# Altium PCB Atmega328p_Breakout.PcbDoc
Units mm, origin at the board's own origin, x right, y up, seen from the top; angles counter-clockwise.
Board outline 72.5 x 60 mm, 2 copper layers (Top Layer, Bottom Layer); 4 components, 28 nets, 71 pads, 5 vias.
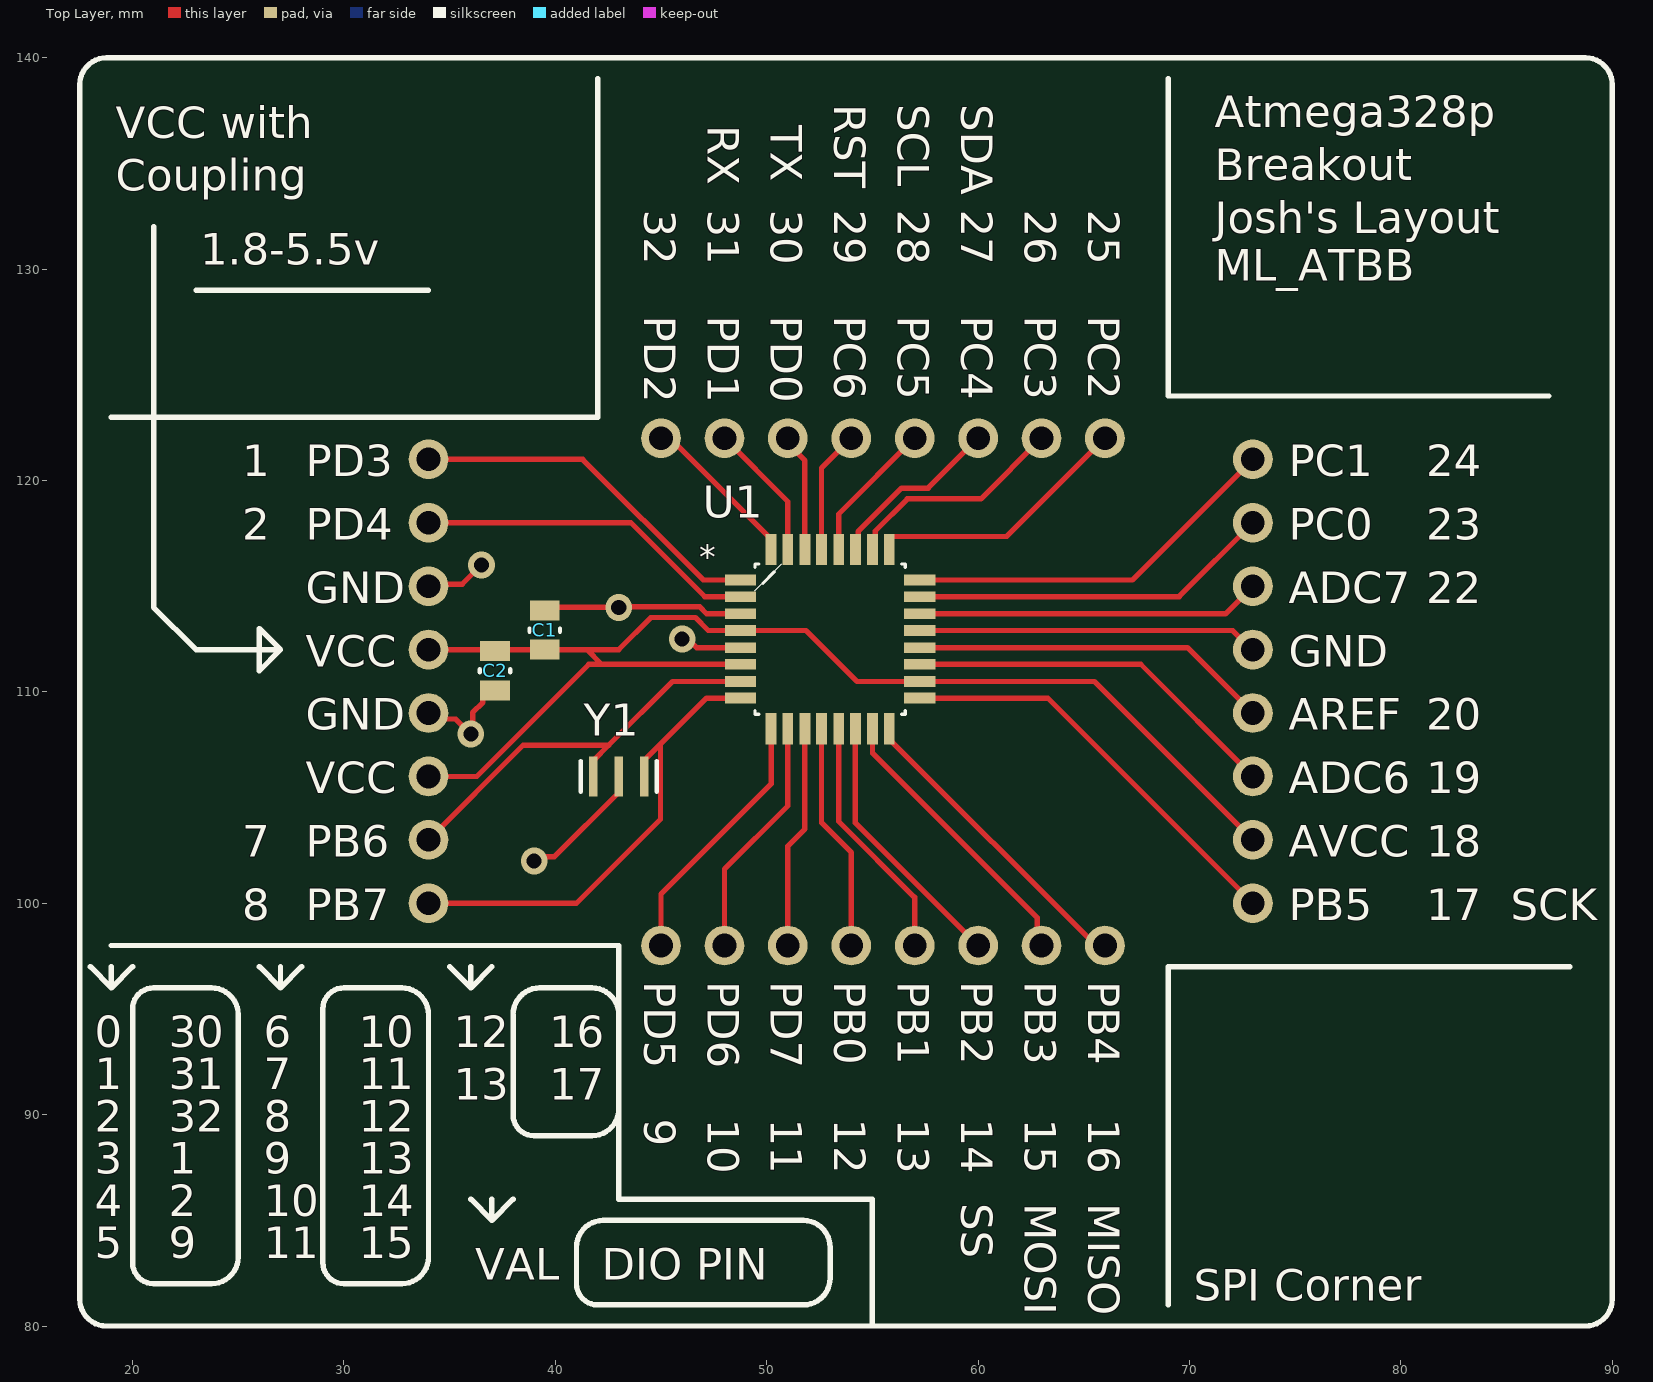
[diagram p0: Top Layer view]
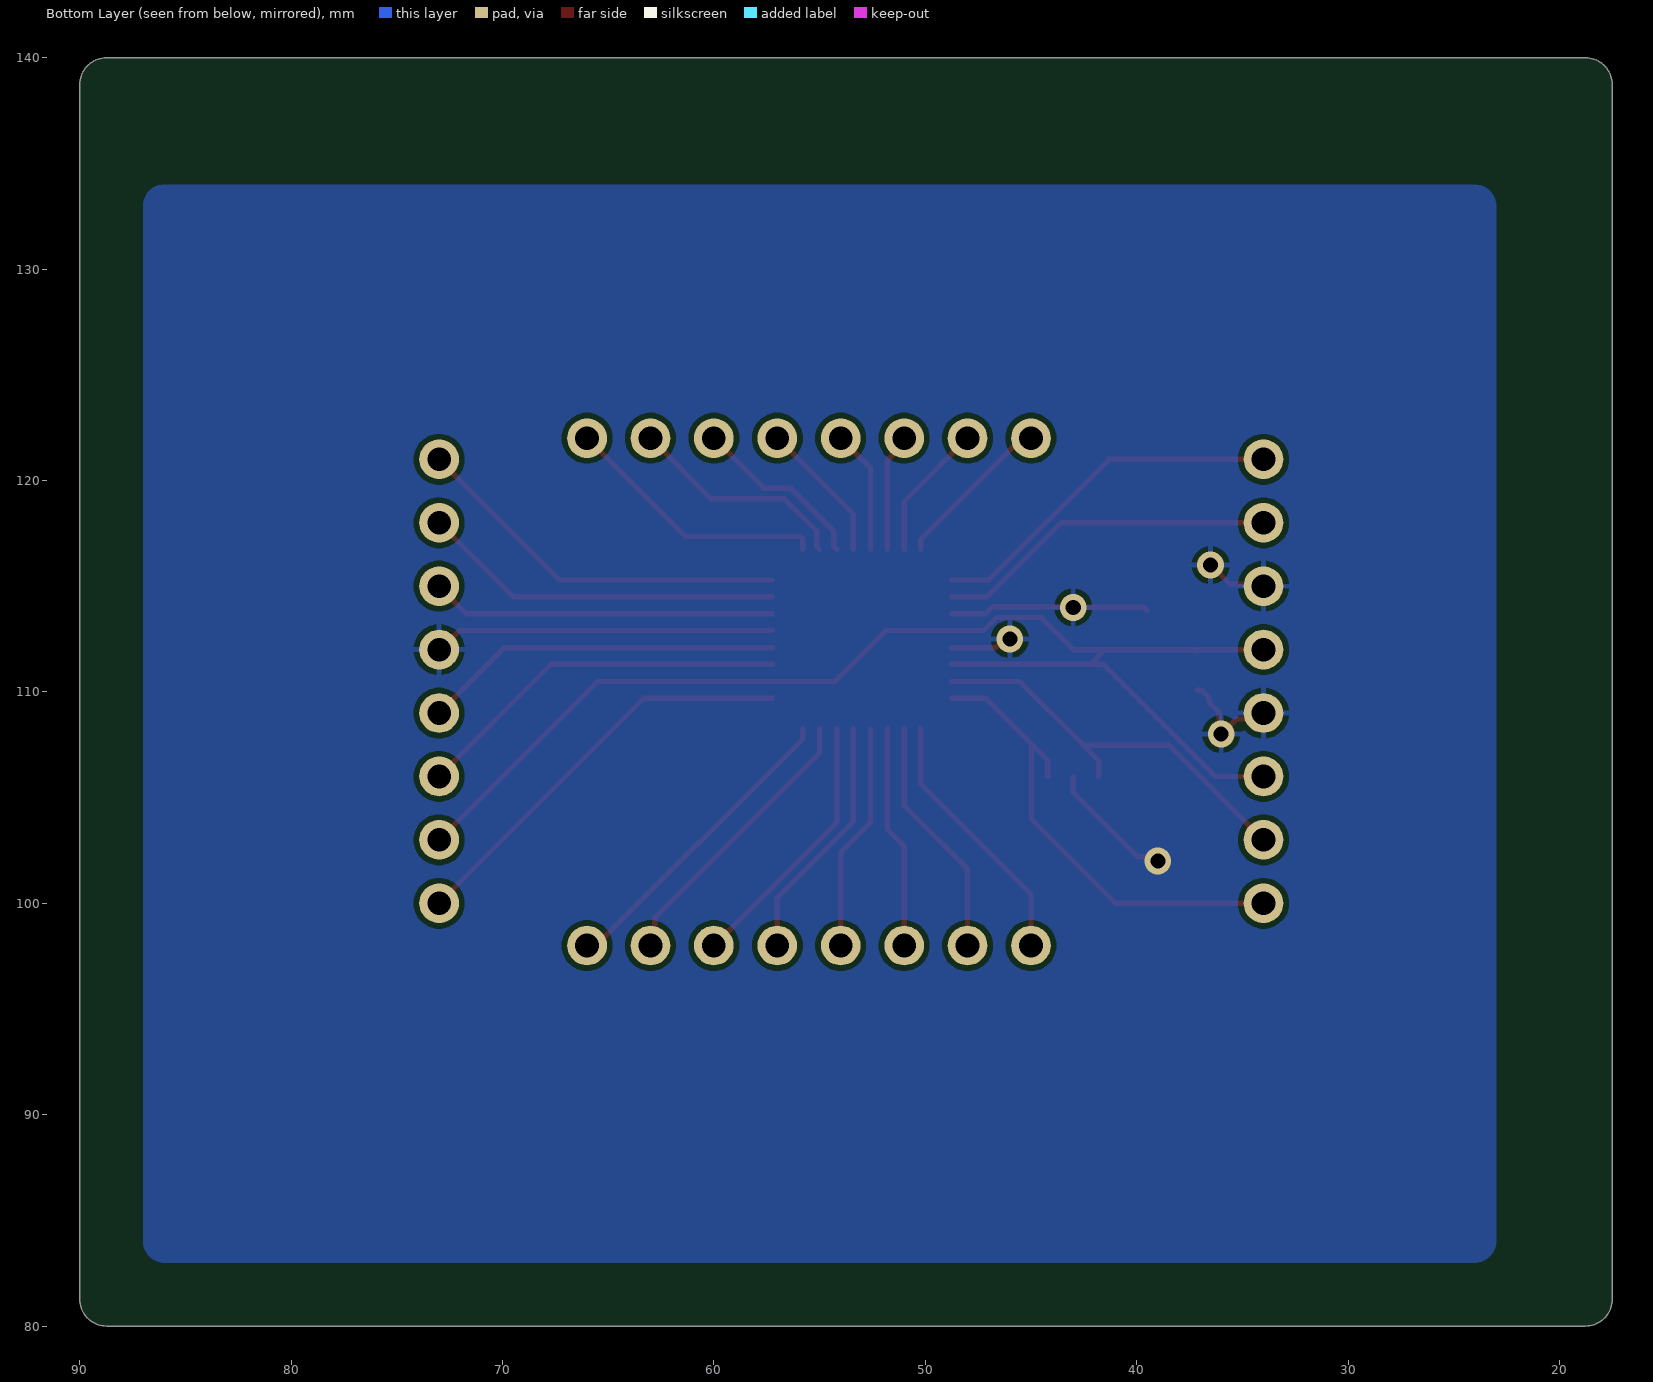
[diagram p1: Bottom Layer view, seen from below]
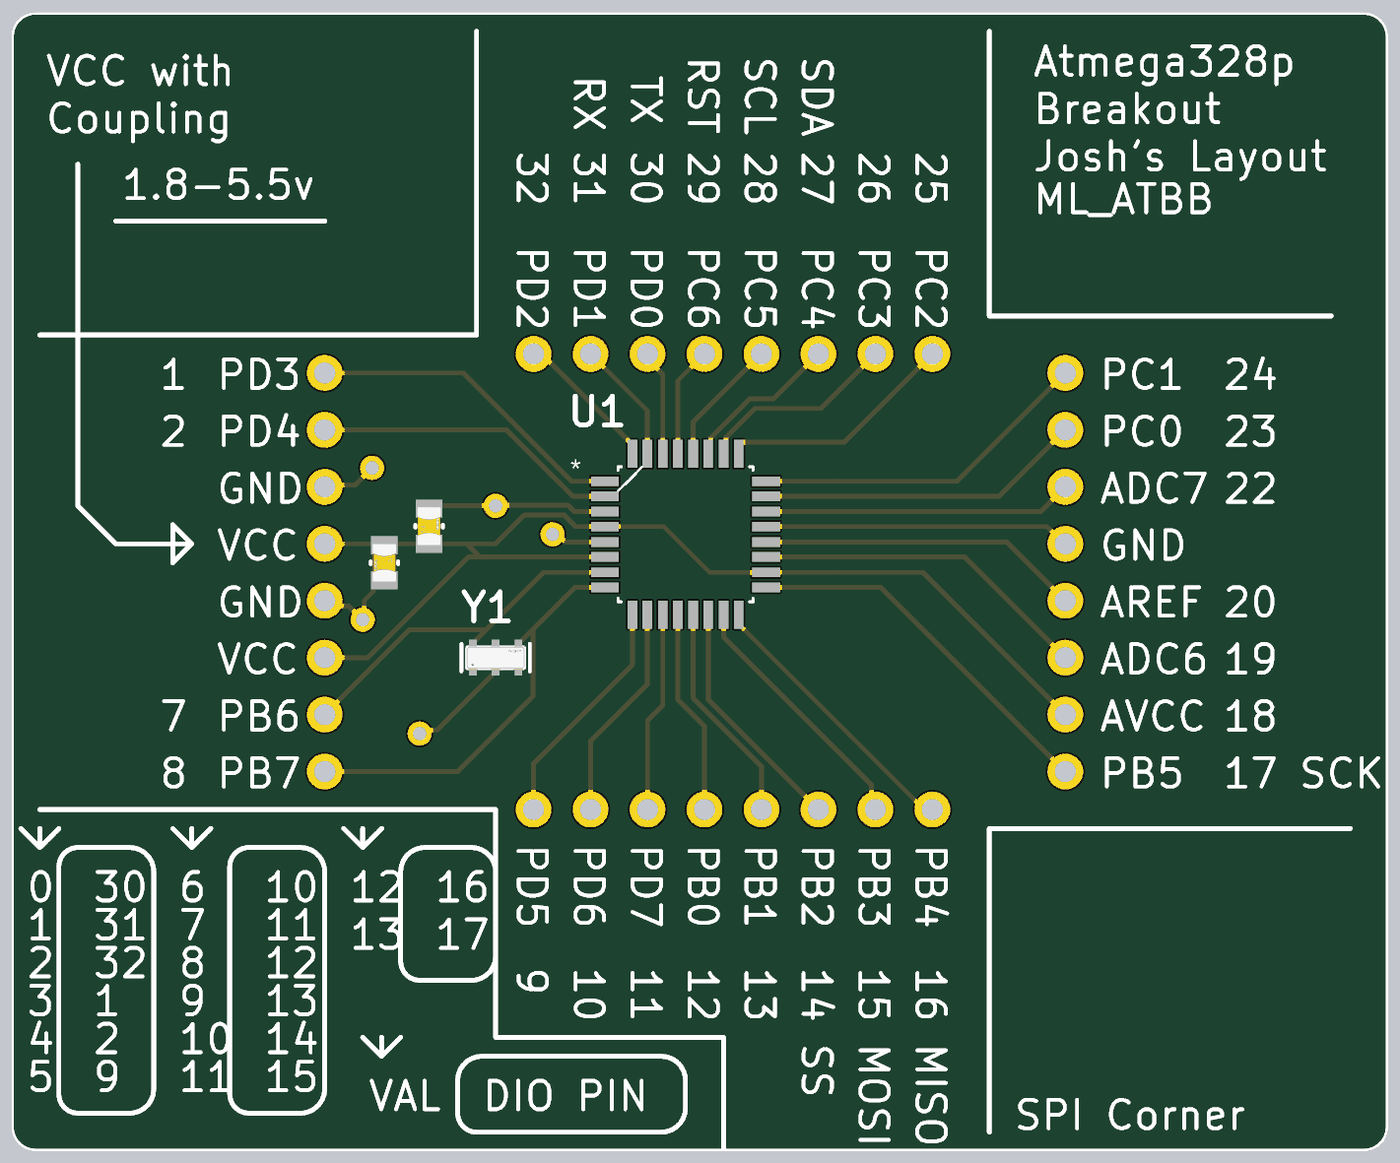
[diagram p2: 3D render of the assembled board from above, using the file's embedded part models]

## Layer stack, top to bottom
Top Solder: solder mask 0.0102, Solder Resist, Dk 3.5
Top Layer: signal copper 0.0356
Dielectric 1: dielectric 0.32, FR-4, Dk 4.8
Bottom Layer: signal copper 0.0356
Bottom Solder: solder mask 0.0102, Solder Resist, Dk 3.5

## Board outline
17.5,81.27 17.5,138.73 cw(c18.77,138.73) 18.77,140 88.73,140 cw(c88.73,138.73) 90,138.73 90,81.27 cw(c88.73,81.27) 88.73,80 18.77,80 cw(c18.77,81.27)

## Design rules (kind name [scope] priority, off if disabled: settings)
Clearance [All] p1: gap=0.254 ignorepadtopadclearanceinfootprint=FALSE
PolygonConnect [All] p1: connectstyle=Relief reliefconductorwidth=0.254 reliefentries=4 polygonreliefangle="90 Angle" airgapwidth=0.254
RoutingVias [All] p1: holewidth=0.711 width=1.27 viastyle="Through Hole" minholewidth=0.711 minwidth=1.27 maxholewidth=0.711 maxwidth=1.27
SolderMaskExpansion [All] p1: expansion=0.102 istentingtop=FALSE
SupplyNets "Schematic Supply Nets_1" [InNet('VCC')] p1: voltage=0.000
SupplyNets "Schematic Supply Nets" [InNet('GND')] p2: voltage=0.000
Width [All] p1: maxlimit=0.254 minlimit=0.254 preferedwidth=0.254
30 further rules are at their usual default settings.

## Components (designator, comment, footprint, x,y, rotation, side; value= is the part's Value field where it differs from the comment)
C1 "10uF" FP-CC0805-0_85-MFG 39.5,112.925 r90 top value="100 nF"
C2 "100nF" FP-CC0805-0_85-MFG 37.146,111 r270 top value="100 nF"
U1 "ATMEL-ATMEGA328P-AU_ATMEGA328P-AU" ATMEL-ATMEGA328P-AU_QFP80P900X900X120-32N 53,112.5 r0 top
Y1 "CSTNE16M0V530000R0" FP-CSTNE16M0V530000R0-MFG 43,106 r180 top

## Footprints (in the part's own frame and the unit in brackets; to place one, negate y for a bottom-side part, rotate by r counter-clockwise, add the part's x,y. Pads: shape width x height; smd on the part's side, far side on the other; paste and mask are expansions set on the pad)
ATMEL-ATMEGA328P-AU_QFP80P900X900X120-32N [mil]
  rect 58x20 smd: 1(-167,110) 2(-167,79) 3(-167,47) 4(-167,16) 5(-167,-16) 6(-167,-47) 7(-167,-79) 8(-167,-110) 17(167,-110) 18(167,-79) 19(167,-47) 20(167,-16) 21(167,16) 22(167,47) 23(167,79) 24(167,110)
  rect 20x58 smd: 9(-110,-167) 10(-79,-167) 11(-47,-167) 12(-16,-167) 13(16,-167) 14(47,-167) 15(79,-167) 16(110,-167) 25(110,167) 26(79,167) 27(47,167) 28(16,167) 29(-16,167) 30(-47,167) 31(-79,167) 32(-110,167)
  silkscreen extent -140,-140 140,140
FP-CC0805-0_85-MFG [mm]
  rect 0.95x1.4 smd paste+0 mask+0: 1(-0.925,0) 2(0.925,0)
  silkscreen extent -0.08,-0.72 0.08,0.72, body extent -1.6,-1.05 1.6,1.05, height 0.25
FP-CSTNE16M0V530000R0-MFG [mm]
  rect 0.4x1.9 smd paste+0 mask+0: 1(1.2,0) 2(0,0) 3(-1.2,0)
  silkscreen extent -1.8,-0.72 1.8,0.72, body extent -1.78,-1.05 1.78,1.05, height 0.25

## Part data
C1 C2: library part CMP-2100-03606-3, "CAP CER 0.1UF 50V X7R 0805", Capacitance="100 nF", Manufacturer=Yageo, Manufacturer Part Number=CC0805KRX7R9BB104, Package=CC0805-0.85, Temperature="-30°C to +85°C", Temperature Characteristic=X7R, Temperature Range High=+85°C, Temperature Range Low=-30°C, Tolerance=0.1, Voltage Rating="50 V", Automotive=No, Category=Cap, ComponentLink2Description=Datasheet, ComponentLink2URL=http://www.yageo.com/documents/recent/UPY-GPHC_Y5V_6.3V-to-50V_8.pdf, Device Class L1="Passive Components", Device Class L2=Capacitors, Device Class L3="Ceramic Capacitors", Digikey Description="CAP CER 0.1UF 50V X7R 0805", Footprint Url=http://www.yageo.com/exep/pages/download/literatures/UPY-C_GEN_24.pdf, Height=0.95mm, Ipc Land Pattern Name=CAPC200125X85, Lead Free=Yes, Material=Ceramic, Mouser Description="Multilayer Ceramic Capacitors MLCC - SMD/SMT 100nF 50V X7R 10%", Octopart=https://octopart.com/cc0805krx7r9bb104-yageo-192993, RoHS=TRUE
U1: MPN=ATMEGA328P-AU, Package=ATMEL-ATMEGA328P-AU_QFP80P900X900X120-32N, DeviceSetName=ATMEL-ATMEGA328P-AU_ATMEGA328P-AU, GateName_1=A, LibraryName=AmbaSat-1v1-01-NO-solar, OC_FARNELL=1715486, OC_NEWARK=14R4631, SUPPLIER=Atmel, SymbolName_1=ATMEL-ATMEGA328P-AU_ATMEGA328P-AU
Y1: library part CMP-06054-000001-1, "CERAMIC RES 16.0000MHZ 15PF SMD", Frequency=16MHz, Load Capacitance=15pF, Manufacturer=Murata, Package=0, Temperature="-40°C to +85°C", Temperature Range High=+85°C, Temperature Range Low=-40°C, Tolerance=0.5%, Automotive=No, Category=Crys, ComponentLink2Description=Datasheet, ComponentLink2URL=https://www.murata.com/en-sg/products/productdata/8801162231838/SPEC-CSTNE16M0V530000R0.pdf?1545967809000, Device Class L1="Passive Components", Device Class L2="Crystals / Oscillators", Device Class L3=Crystals, Digikey Description="CERAMIC RES 16.0000MHZ 15PF SMD", Esr=40Ω, Height=1mm, Lead Free=Yes, Manufacturer Part Number=CSTNE16M0V530000R0, Mouser Description="Ceramic Resonator 16MHz ±0.5% (Tol) ±0.3% (Stability) 15pF 40Ohm 3-Pin CSMD T/R", Octopart=https://octopart.com/cstne16m0v530000r0-murata-91406924, RoHS=TRUE, Series=CSTNE_V, Stability=0.3%

## Free pads (board coordinates)
  round 1.88 hole 1.118: 5(45,98) 6(48,98) 7(51,98) 8(54,98) 9(57,98) 10(60,98) 11(63,98) 12(66,98) 13(73,106) 14(73,109) 15(73,112) 16(73,115) 17(73,118) 18(73,121) 19(73,103) 20(73,100) 21(66,122) 22(63,122) 23(60,122) 24(57,122) 25(54,122) 26(51,122) 27(48,122) 28(45,122) 29(34,100) 30(34,103) 31(34,106) 32(34,109) 33(34,112) 34(34,115) 35(34,118) 36(34,121)

## Via types
v1: diameter 1.27, hole 0.711, Top Layer to Bottom Layer, 5 vias

## Nets (pads, with @x,y where several pads share a name; then routed paths per layer and width w, separated by ;. In a path a pad name is that pad's centre, name@x,y a point inside that pad or via, vN(x,y) a via of type N, cw(c..) or ccw(c..) an arc to the next point about the centre after c; other vN are vias at no path point)
ADC_6: pad.13 U1.19 | length 18
  Top Layer w0.254: U1.19 67.694,111.306 pad.13
ADC_7: pad.16 U1.22 | length 16.3
  Top Layer w0.254: U1.22 71.694,113.694 pad.16
AREF: pad.14 U1.20 | length 17
  Top Layer w0.254: U1.20 69.906,112.094 pad.14
GND: C1.2 C2.2 pad.15 pad.32 pad.34 U1.3 U1.5 U1.21 Y1.2 | length 42.6
  Top Layer w0.254: pad.32 34.282,108.718 35.282,108.718 v1(36,108) 36.087,108.087 36.087,109.016 36.573,109.502 36.573,109.727 36.921,110.075 C2.2 ; pad.34 34.096,115.096 35.596,115.096 v1(36.5,116) ; v1(39,102) 39.194,102.194 39.944,102.194 43,105.25 Y1.2 ; C1.2 39.65,114 v1(43,114) 43.024,114.024 46.833,114.024 47.163,113.694 U1.3 ; v1(46,112.5) 46.275,112.5 46.681,112.094 U1.5 ; U1.21 72.039,112.906 72.945,112 pad.15
NetU1_7: pad.30 U1.7 Y1.1 | length 19.6
  Top Layer w0.254: pad.30 38.475,107.475 42.525,107.475 ; Y1.1 41.8,106.75 42.525,107.475 ; U1.7 45.543,110.493 42.525,107.475
NetU1_8: pad.29 U1.8 Y1.3 | length 22.7
  Top Layer w0.254: pad.29 41,100 44.975,103.975 44.975,107.525 ; Y1.3 44.2,106.75 44.975,107.525 ; U1.8 47.156,109.706 44.975,107.525
PB0: pad.8 U1.12 | length 10.8
  Top Layer w0.254: U1.12 52.594,103.811 54,102.405 pad.8
PB1: pad.9 U1.13 | length 11.7
  Top Layer w0.254: U1.13 53.406,103.875 57,100.282 pad.9
PB2: pad.10 U1.14 | length 12.7
  Top Layer w0.254: U1.14 54.194,103.806 pad.10
PB3: pad.11 U1.15 | length 13.6
  Top Layer w0.254: U1.15 55.007,107.104 62.79,99.321 62.79,98.21 pad.11
PB4: pad.12 U1.16 | length 14.7
  Top Layer w0.254: U1.16 55.794,107.776 65.57,98 pad.12
PB5: pad.20 U1.17 | length 19.8
  Top Layer w0.254: U1.17 63.294,109.706 pad.20
PC_0: pad.17 U1.23 | length 17.2
  Top Layer w0.254: U1.23 69.507,114.507 pad.17
PC_1: pad.18 U1.24 | length 18.1
  Top Layer w0.254: U1.24 67.294,115.294 pad.18
PC_2: pad.21 U1.25 | length 12.7
  Top Layer w0.254: U1.25 55.794,117.224 55.921,117.351 61.351,117.351 pad.21
PC_3: pad.22 U1.26 | length 10.6
  Top Layer w0.254: U1.26 55.134,116.869 55.134,117.611 56.652,119.129 60.129,119.129 pad.22
PC_4: pad.23 U1.27 | length 8.4
  Top Layer w0.254: U1.27 54.321,116.869 54.321,117.585 56.373,119.637 57.637,119.637 pad.23
PC_5: pad.24 U1.28 | length 6.7
  Top Layer w0.254: U1.28 53.406,118.406 pad.24
PC_6: pad.25 U1.29 | length 5.8
  Top Layer w0.254: U1.29 52.594,120.594 pad.25
PD_0: pad.26 U1.30 | length 5.6
  Top Layer w0.254: pad.26 51,121.745 51.806,120.938 U1.30
PD_1: pad.27 U1.31 | length 6.5
  Top Layer w0.254: pad.27 50.993,119.007 U1.31
PD_2: pad.28 U1.32 | length 7.7
  Top Layer w0.254: pad.28 45.43,122 50.206,117.224 U1.32
PD_3: pad.36 U1.1 | length 17.1
  Top Layer w0.254: pad.36 41.294,121 47,115.294 U1.1
PD_4: pad.35 U1.2 | length 16.2
  Top Layer w0.254: pad.35 43.575,118 47.069,114.507 U1.2
PD_5: pad.5 U1.9 | length 12.4
  Top Layer w0.254: pad.5 45,100.441 50.206,105.647 U1.9
PD_6: pad.6 U1.10 | length 11.5
  Top Layer w0.254: pad.6 48,101.611 50.993,104.604 U1.10
PD_7: pad.7 U1.11 | length 10.6
  Top Layer w0.254: pad.7 51,102.705 51.806,103.511 U1.11
VCC: C1.1 C2.1 pad.19 pad.31 pad.33 U1.4 U1.6 U1.18 | length 61.9
  Top Layer w0.254: pad.31 36.282,106 41.588,111.306 42.194,111.306 ; pad.33 37.071,112 C2.1 37.221,112 C1.1 41.5,112 ; U1.4@48.665,112.906 47.232,112.906 46.623,113.516 44.516,113.516 43,112 41.5,112 ; U1.6 42.194,111.306 ; U1.4 51.857,112.906 54.27,110.493 U1.18 65.507,110.493 pad.19 ; 41.5,112 42.194,111.306

## Polygon pours and split planes (outlines as drawn)
GND on Bottom Layer "GND_L02_P000" (solid, pour order 0): 86,134 cw(c86,133) 87,133 87,84 cw(c86,84) 86,83 24,83 cw(c24,84) 23,84 23,133 cw(c24,133) 24,134

## Silkscreen, mask and mechanical layers (free items; w line width, h text height)
Top Overlay:
  lines w0.254: 18,97 19,96 ; 19,97 19,96 ; 19,98 43,98 43,86 55,86 55,80 ; 19,123 42,123 42,139 ; 20,97 19,96 ; 21,132 21,128 21,118 21,114 23,112 27,112 ; 23,129 34,129 ; 26,97 27,96 ; 27,97 27,96 ; 28,97 27,96 ; 35,97 36,96 ; 36,86 37,85 ; 36,97 36,96 ; 37,86 37,85 ; 37,97 36,96 ; 38,86 37,85 ; 69,81 69,97 88,97 ; 69,139 69,124 87,124 ; 27,112 26,111 26,113 27,112 ; 17.5,81.27 ccw(c18.77,81.27) 18.77,80 88.73,80 ccw(c88.73,81.27) 90,81.27 90,138.73 ccw(c88.73,138.73) 88.73,140 18.77,140 ccw(c18.77,138.73) 17.5,138.73 17.5,137.5 17.5,81.27 ; 20,83 ccw(c21,83) 21,82 23.73,82 ccw(c23.73,83.27) 25,83.27 25,94.73 ccw(c23.73,94.73) 23.73,96 21,96 ccw(c21,95) 20,95 20,83 ; 29,83 ccw(c30,83) 30,82 32.73,82 ccw(c32.73,83.27) 34,83.27 34,94.73 ccw(c32.73,94.73) 32.73,96 30,96 ccw(c30,95) 29,95 29,83 ; 38,90 ccw(c39,90) 39,89 41.73,89 ccw(c41.73,90.27) 43,90.27 43,94.73 ccw(c41.73,94.73) 41.73,96 39.27,96 ccw(c39.27,94.73) 38,94.73 38,90 ; 41,82 ccw(c42,82) 42,81 51.73,81 ccw(c51.73,82.27) 53,82.27 53,83.73 ccw(c51.73,83.73) 51.73,85 42.27,85 ccw(c42.27,83.73) 41,83.73 41,82
  text "RST" at 53.2,137.8 h1.5 r270
  text "SCL" at 56.2,137.8 h1.5 r270
  text "SDA" at 59.2,137.8 h1.5 r270
  text "RX" at 47.2,136.8 h1.5 r270
  text "TX" at 50.2,136.8 h1.5 r270
  text "Atmega328p" at 71.2,136.7 h1.5
  text "VCC with" at 19.2,136.2 h1.5
  text "Breakout" at 71.2,134.2 h1.5
  text "Coupling" at 19.2,133.7 h1.5
  text "32" at 44.2,132.8 h1.5 r270
  text "31" at 47.2,132.8 h1.5 r270
  text "30" at 50.2,132.8 h1.5 r270
  text "29" at 53.2,132.8 h1.5 r270
  text "28" at 56.2,132.8 h1.5 r270
  text "27" at 59.2,132.8 h1.5 r270
  text "26" at 62.2,132.8 h1.5 r270
  text "25" at 65.2,132.8 h1.5 r270
  text "Josh's Layout" at 71.2,131.7 h1.5
  text "1.8-5.5v" at 23.2,130.2 h1.5
  text "ML_ATBB" at 71.2,129.45 h1.5
  text "PD2" at 44.2,127.8 h1.5 r270
  text "PD1" at 47.2,127.8 h1.5 r270
  text "PD0" at 50.2,127.8 h1.5 r270
  text "PC6" at 53.2,127.8 h1.5 r270
  text "PC5" at 56.2,127.8 h1.5 r270
  text "PC4" at 59.2,127.8 h1.5 r270
  text "PC3" at 62.2,127.8 h1.5 r270
  text "PC2" at 65.2,127.8 h1.5 r270
  text "1" at 25.2,120.2 h1.5
  text "PD3" at 28.2,120.2 h1.5
  text "PC1" at 74.7,120.2 h1.5
  text "24" at 81.2,120.2 h1.5
  text "2" at 25.2,117.2 h1.5
  text "PD4" at 28.2,117.2 h1.5
  text "PC0" at 74.7,117.2 h1.5
  text "23" at 81.2,117.2 h1.5
  text "GND" at 28.2,114.2 h1.5
  text "ADC7" at 74.7,114.2 h1.5
  text "22" at 81.2,114.2 h1.5
  text "VCC" at 28.2,111.2 h1.5
  text "GND" at 74.7,111.2 h1.5
  text "GND" at 28.2,108.2 h1.5
  text "AREF" at 74.7,108.2 h1.5
  text "20" at 81.2,108.2 h1.5
  text "VCC" at 28.2,105.2 h1.5
  text "ADC6" at 74.7,105.2 h1.5
  text "19" at 81.2,105.2 h1.5
  text "7" at 25.2,102.2 h1.5
  text "PB6" at 28.2,102.2 h1.5
  text "AVCC" at 74.7,102.2 h1.5
  text "18" at 81.2,102.2 h1.5
  text "8" at 25.2,99.2 h1.5
  text "PB7" at 28.2,99.2 h1.5
  text "PB5" at 74.7,99.2 h1.5
  text "17" at 81.2,99.2 h1.5
  text "SCK" at 85.2,99.2 h1.5
  text "PD5" at 44.2,96.3 h1.5 r270
  text "PD6" at 47.2,96.3 h1.5 r270
  text "PD7" at 50.2,96.3 h1.5 r270
  text "PB0" at 53.2,96.3 h1.5 r270
  text "PB1" at 56.2,96.3 h1.5 r270
  text "PB2" at 59.2,96.3 h1.5 r270
  text "PB3" at 62.2,96.3 h1.5 r270
  text "PB4" at 65.2,96.3 h1.5 r270
  text "0" at 18.2,93.2 h1.5
  text "30" at 21.7,93.2 h1.5
  text "6" at 26.2,93.2 h1.5
  text "10" at 30.7,93.2 h1.5
  text "12" at 35.2,93.2 h1.5
  text "16" at 39.7,93.2 h1.5
  text "1" at 18.2,91.2 h1.5
  text "31" at 21.7,91.2 h1.5
  text "7" at 26.2,91.2 h1.5
  text "11" at 30.7,91.2 h1.5
  text "13" at 35.2,90.7 h1.5
  text "17" at 39.7,90.7 h1.5
  text "9" at 44.2,89.8 h1.5 r270
  text "10" at 47.2,89.8 h1.5 r270
  text "11" at 50.2,89.8 h1.5 r270
  text "12" at 53.2,89.8 h1.5 r270
  text "13" at 56.2,89.8 h1.5 r270
  text "14" at 59.2,89.8 h1.5 r270
  text "15" at 62.2,89.8 h1.5 r270
  text "16" at 65.2,89.8 h1.5 r270
  text "2" at 18.2,89.2 h1.5
  text "32" at 21.7,89.2 h1.5
  text "8" at 26.2,89.2 h1.5
  text "12" at 30.7,89.2 h1.5
  text "3" at 18.2,87.2 h1.5
  text "1" at 21.7,87.2 h1.5
  text "9" at 26.2,87.2 h1.5
  text "13" at 30.7,87.2 h1.5
  text "SS" at 59.2,85.8 h1.5 r270
  text "MOSI" at 62.2,85.8 h1.5 r270
  text "MISO" at 65.2,85.8 h1.5 r270
  text "4" at 18.2,85.2 h1.5
  text "2" at 21.7,85.2 h1.5
  text "10" at 26.2,85.2 h1.5
  text "14" at 30.7,85.2 h1.5
  text "5" at 18.2,83.2 h1.5
  text "9" at 21.7,83.2 h1.5
  text "11" at 26.2,83.2 h1.5
  text "15" at 30.7,83.2 h1.5
  text "VAL" at 36.2,82.2 h1.5
  text "DIO PIN" at 42.2,82.2 h1.5
  text "SPI Corner" at 70.2,81.2 h1.5

## Text inside footprints (layer, text, board x,y; h text height)
U1: Top Overlay "*" at 46.802,115.446 h1.97; Mechanical 7 "*" at 46.802,115.446 h1.97